# EAGLE board USBtiny (EAGLE 7.2.0)
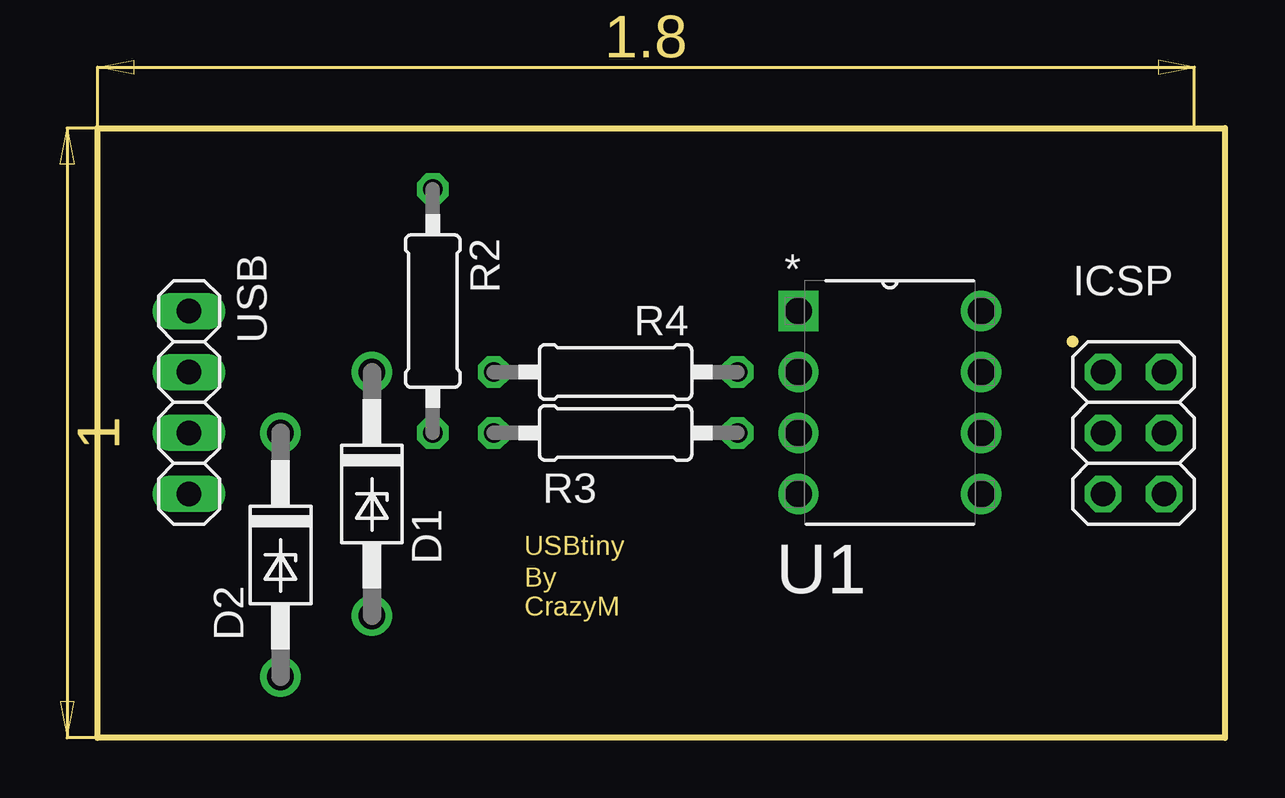
[diagram p0: board, top side]
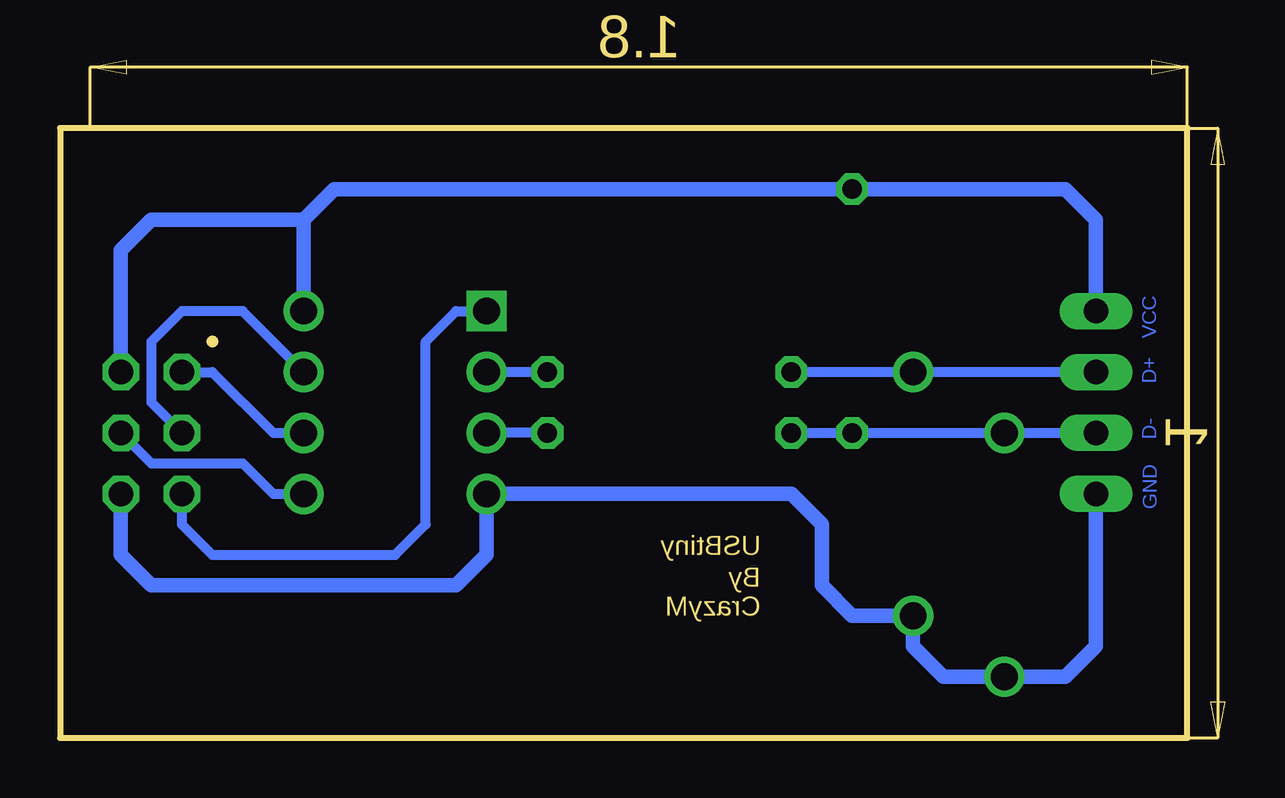
[diagram p1: board, bottom side, seen from below]

Size 46.99 x 25.4 mm. Coordinates in mm from the lower left corner, seen from the top.
Outline: 0,0 0,25.4 46.99,25.4 46.99,0 0,0
Outline: circle at 40.64,16.51 radius 0.11
Copper layers (1*16): Top 0.035mm / dielectric 1.5mm / Bottom 0.035mm
Design rules "default": minimum track width 10mil, minimum drill 24mil, track to track 8mil, track to pad 8mil, pad to pad 8mil, via to via 8mil, smd to smd 8mil, copper to edge 40mil, drill to drill 8mil, minimum pad ring 10mil, minimum via ring 8mil, stop-mask expansion 4mil, vias tented up to drill 0mil, thermal gap 10mil

## Footprints (pad centres in the part's own frame; a part is rotated, then mirrored left to right if it is on the bottom)
DO41Z10 = drill 1.118: A 5.08,0; C -5.08,0
2X03 = drill 1.016 octagon: 1 -2.54,-1.27; 2 -2.54,1.27; 3 0,-1.27; 4 0,1.27; 5 2.54,-1.27; 6 2.54,1.27
0207/10 = drill 0.813 octagon: 1 -5.08,0; 2 5.08,0
DIP254P762X533-8 = drill 1.118 square: 1 -7.62,7.62 | drill 1.118: 2 -7.62,5.08; 3 -7.62,2.54; 4 -7.62,0; 5 0,0; 6 0,2.54; 7 0,5.08; 8 0,7.62
1X04 = drill 1.016 long: 1 -3.81,0; 2 -1.27,0; 3 1.27,0; 4 3.81,0

## Placement (x,y rotation side)
D1  [DO41Z10]  11.43,10.16 270 top
D2  [DO41Z10]  7.62,7.62 270 top
ICSP  C2  [2X03]  43.18,12.7 270 top
R2  1K7  [0207/10]  13.97,17.78 270 top
R3  68R  [0207/10]  21.59,12.7 0 top
R4  68R  [0207/10]  21.59,15.24 0 top
U1  ATTINY85-20PU  [DIP254P762X533-8]  36.83,10.16 0 top
USB  C1  [1X04]  3.81,13.97 90 top

## Library data of the parts
D1 D2 = diode
ICSP USB = pinhead
R2-R4 = rcl
U1 = Atmel_By_element14_Batch_1-00; MPN: ATTINY85-20PU; OC_FARNELL: 1455162; OC_NEWARK: 58M3796; PACKAGE: PDIP-8; SUPPLIER: Atmel

## Nets
+5V: ICSP.2 R2.1 U1.8 USB.4
GND: D1.A D2.A ICSP.6 U1.4 USB.1
N$1: R4.2 U1.2
N$2: R3.2 U1.3
N$3: D2.C R2.2 R3.1 USB.2
N$4: D1.C R4.1 USB.3
N$5: ICSP.5 U1.1
N$6: ICSP.1 U1.6
N$7: ICSP.3 U1.7
N$8: ICSP.4 U1.5

## Tracks (layer width: path | path; a pad name or v marks a point on that pad's centre or on a via)
+5V
  Bottom 0.61: USB.4 3.81,21.59 5.08,22.86 R2.1 35.56,22.86 36.83,21.59 | 36.83,21.59 U1.8 | ICSP.2 44.45,20.32 43.18,21.59 36.83,21.59
GND
  Bottom 0.61: ICSP.6 44.45,7.62 43.18,6.35 30.48,6.35 29.21,7.62 U1.4 16.51,10.16 15.24,8.89 15.24,6.35 13.97,5.08 D1.A 11.43,3.81 10.16,2.54 D2.A 5.08,2.54 3.81,3.81 USB.1
N$1
  Bottom 0.406: R4.2 U1.2
N$2
  Bottom 0.406: R3.2 U1.3
N$3
  Bottom 0.406: R3.1 R2.2 D2.C USB.2
N$4
  Bottom 0.406: USB.3 D1.C R4.1
N$5
  Bottom 0.406: ICSP.5 41.91,8.89 40.64,7.62 33.02,7.62 31.75,8.89 31.75,16.51 30.48,17.78 U1.1
N$6
  Bottom 0.406: ICSP.1 40.64,15.24 38.1,12.7 U1.6
N$7
  Bottom 0.406: U1.7 39.37,17.78 41.91,17.78 43.18,16.51 43.18,13.97 ICSP.3
N$8
  Bottom 0.406: ICSP.4 43.18,11.43 39.37,11.43 38.1,10.16 U1.5

## Text on the board
Bottom: VCC | D+ | D- | GND
Dimension: USBtiny | By / CrazyM